# EAGLE board boosst_new (EAGLE 7.5.0)
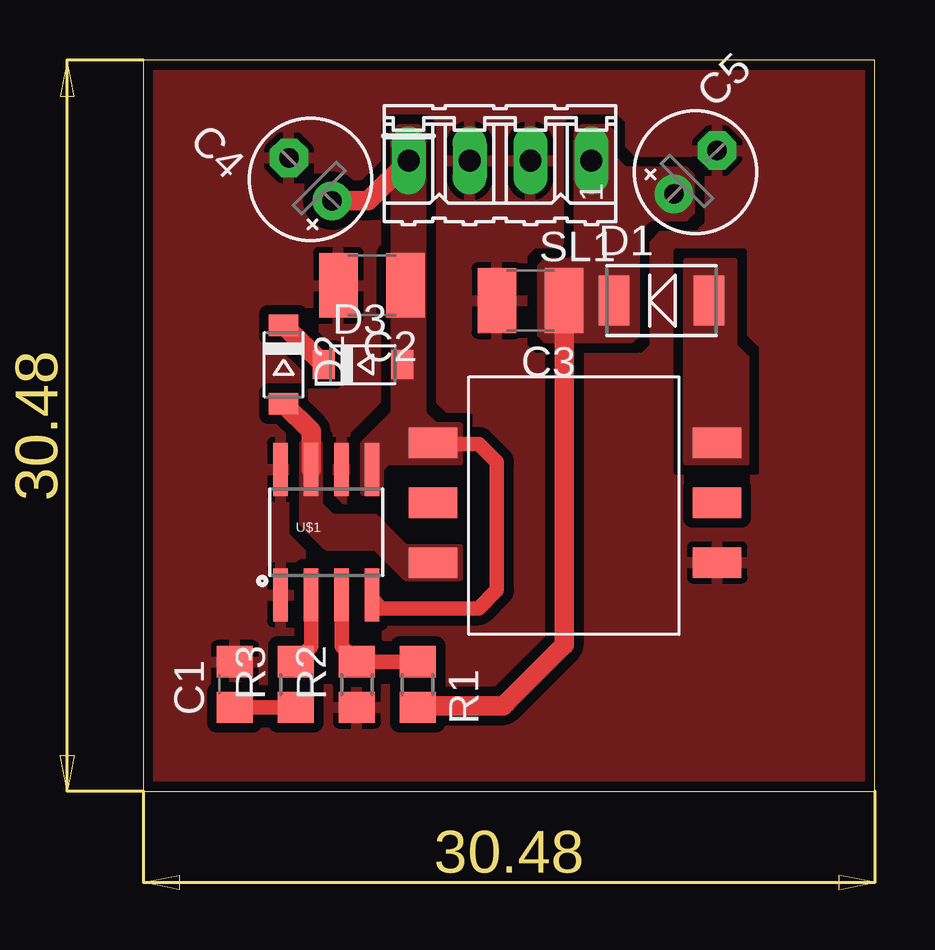
[diagram p0: board, top side]

Size 30.48 x 30.48 mm. Coordinates in mm from the lower left corner, seen from the top.
Outline: 0,0 30.48,0 30.48,30.48 0,30.48 0,0
Copper layers (1*16): Top 0.035mm / dielectric 1.5mm / Bottom 0.035mm
Design rules "default *": minimum track width 10mil, minimum drill 24mil, track to track 8mil, track to pad 8mil, pad to pad 8mil, via to via 8mil, smd to smd 8mil, copper to edge 10mil, drill to drill 8mil, minimum pad ring 10mil, minimum via ring 8mil, stop-mask expansion 4mil, vias tented up to drill 0mil, thermal gap 10mil

## Footprints (pad centres in the part's own frame; a part is rotated, then mirrored left to right if it is on the bottom)
C0805 = smd 1.3 x 1.5: 1 -0.95,0; 2 0.95,0
C1210 = smd 1.6 x 2.7: 1 -1.4,0; 2 1.4,0
E2,5-5 = drill 0.813 pad 1.6: + -1.27,0 | drill 0.813 pad 1.6 octagon: - 1.27,0
DO-214AC = smd 1.27 x 2.1: 1 -1.98,0; 2 1.98,0
SOD-123 = smd 0.91 x 1.22: A 1.635,0; C -1.635,0
R0805 = smd 1.3 x 1.5: 1 -0.95,0; 2 0.95,0
04P = drill 0.914 long: 1 -3.81,0; 2 -1.27,0; 3 1.27,0; 4 3.81,0
SOIC8 = smd 0.61 x 2.21: 1 -1.905,-2.616; 2 -0.635,-2.616; 3 0.635,-2.616; 4 1.905,-2.616; 5 1.905,2.616; 6 0.635,2.616; 7 -0.635,2.616; 8 -1.905,2.616
FA2469 = smd 2.03 x 1.27: 1 0,0; 2 0,2.5; 3 0,5; 4 11.84,5; 5 11.84,2.5; 6 11.84,0

## Placement (x,y rotation side)
C1  [C0805]  3.81,4.45 90 top
C2  [C1210]  9.53,21.08 180 top
C3  [C1210]  16.13,20.45 180 top
C4  [E2,5-5]  6.96,25.51 135 top
C5  [E2,5-5]  23.01,25.8 45 top
D1  [DO-214AC]  21.59,20.45 0 top
D2  [SOD-123]  5.84,17.78 270 top
D3  [SOD-123]  9.14,17.78 0 top
R1  [R0805]  11.43,4.45 270 top
R2  [R0805]  8.89,4.45 90 top
R3  [R0805]  6.35,4.45 90 top
SL1  [04P]  14.86,26.29 180 top
U$1  MC3172YM  [SOIC8]  7.62,10.79 0 top
U$2  FA2469-ALB  [FA2469]  12.06,9.53 0 top

## Library data of the parts
C1-C5 R1-R3 = rcl
D1-D3 = dp_devices
SL1 = con-amp-quick; OC_FARNELL: unknown; OC_NEWARK: unknown
U$1 U$2 = custom_lbr

## Nets
GND: C1.2 C2.2 C3.2 C4.- C5.- R2.1 SL1.2 SL1.3 U$1.1 U$1.6 U$1.8 U$2.6
N$2: D2.C D3.C
N$3: D1.2 U$2.4
N$4: R3.2 U$1.2
N$5: R1.1 R2.2 U$1.3
N$8: C1.1 R3.1
SW: D2.A U$1.7 U$2.1
VIN: C2.1 C4.+ D3.A SL1.4 U$1.4 U$1.5 U$2.3
VOUT: C3.1 C5.+ D1.1 R1.2 SL1.1

## Tracks (layer width: path | path; a pad name or v marks a point on that pad's centre or on a via)
GND
  pour Top (isolate 0.406, rank 6): 0,30.48 30.48,30.48 30.48,0 0,0
N$2
  Top 0.813: D2.C 5.87,19.41 D3.C
N$3
  pour Top (no thermals): 22.61,13.72 25.15,13.72 25.15,18.03 24.64,18.54 24.64,22.1 22.61,22.1
N$4
  Top 0.61: U$1.2 6.99,6.03 R3.2
N$5
  Top 0.61: U$1.3 8.26,6.03 R2.2 R1.1
N$8
  Top 0.61: C1.1 R3.1
SW
  Top 0.813: U$1.7 6.99,15 D2.A
  pour Top (no thermals): 6.6,14.48 6.6,11.18 7.62,10.16 9.65,10.16 10.92,8.89 13.21,8.89 13.21,10.16 10.92,10.16 9.65,11.43 7.87,11.43 7.37,11.94 7.37,14.48
VIN
  Top 0.61: U$1.4 9.53,8 9.91,7.62 13.97,7.62 14.73,8.38 14.73,13.72 13.97,14.48 12.11,14.48 U$2.3
  Top 0.813: C4.+ 9.37,24.61 SL1.4
  pour Top (no thermals): 9.14,12.45 9.91,12.45 9.91,13.43 10.19,13.72 13.21,13.72 13.21,15.24 12.19,15.24 11.68,15.75 11.68,27.43 11.43,27.69 10.67,27.69 10.41,27.43 10.41,15.75 9.14,14.48
VOUT
  Top 0.61: 11.49,3.56 R1.2
  Top 0.813: C3.1 17.53,6.1 15.11,3.68 14.99,3.56 11.49,3.56
  pour Top (no thermals): 16.51,21.84 16.51,19.05 16.76,18.8 20.32,18.8 20.57,19.05 20.57,23.37 21.08,23.88 22.61,23.88 22.86,24.13 22.86,25.65 22.61,25.91 20.07,25.91 19.56,26.42 19.56,27.43 19.3,27.69 18.29,27.69 18.03,27.43 18.03,22.35 17.78,22.1 16.76,22.1